# Altium PCB RadioPod_3.PcbDoc
Units mm, origin at the board's own origin, x right, y up, seen from the top; angles counter-clockwise.
Board outline 48.8 x 62.2 mm, 3 copper layers (Top Layer, GND, Bottom Layer), stack 0.488 mm thick; 70 components, 115 nets, 414 pads, 64 vias.
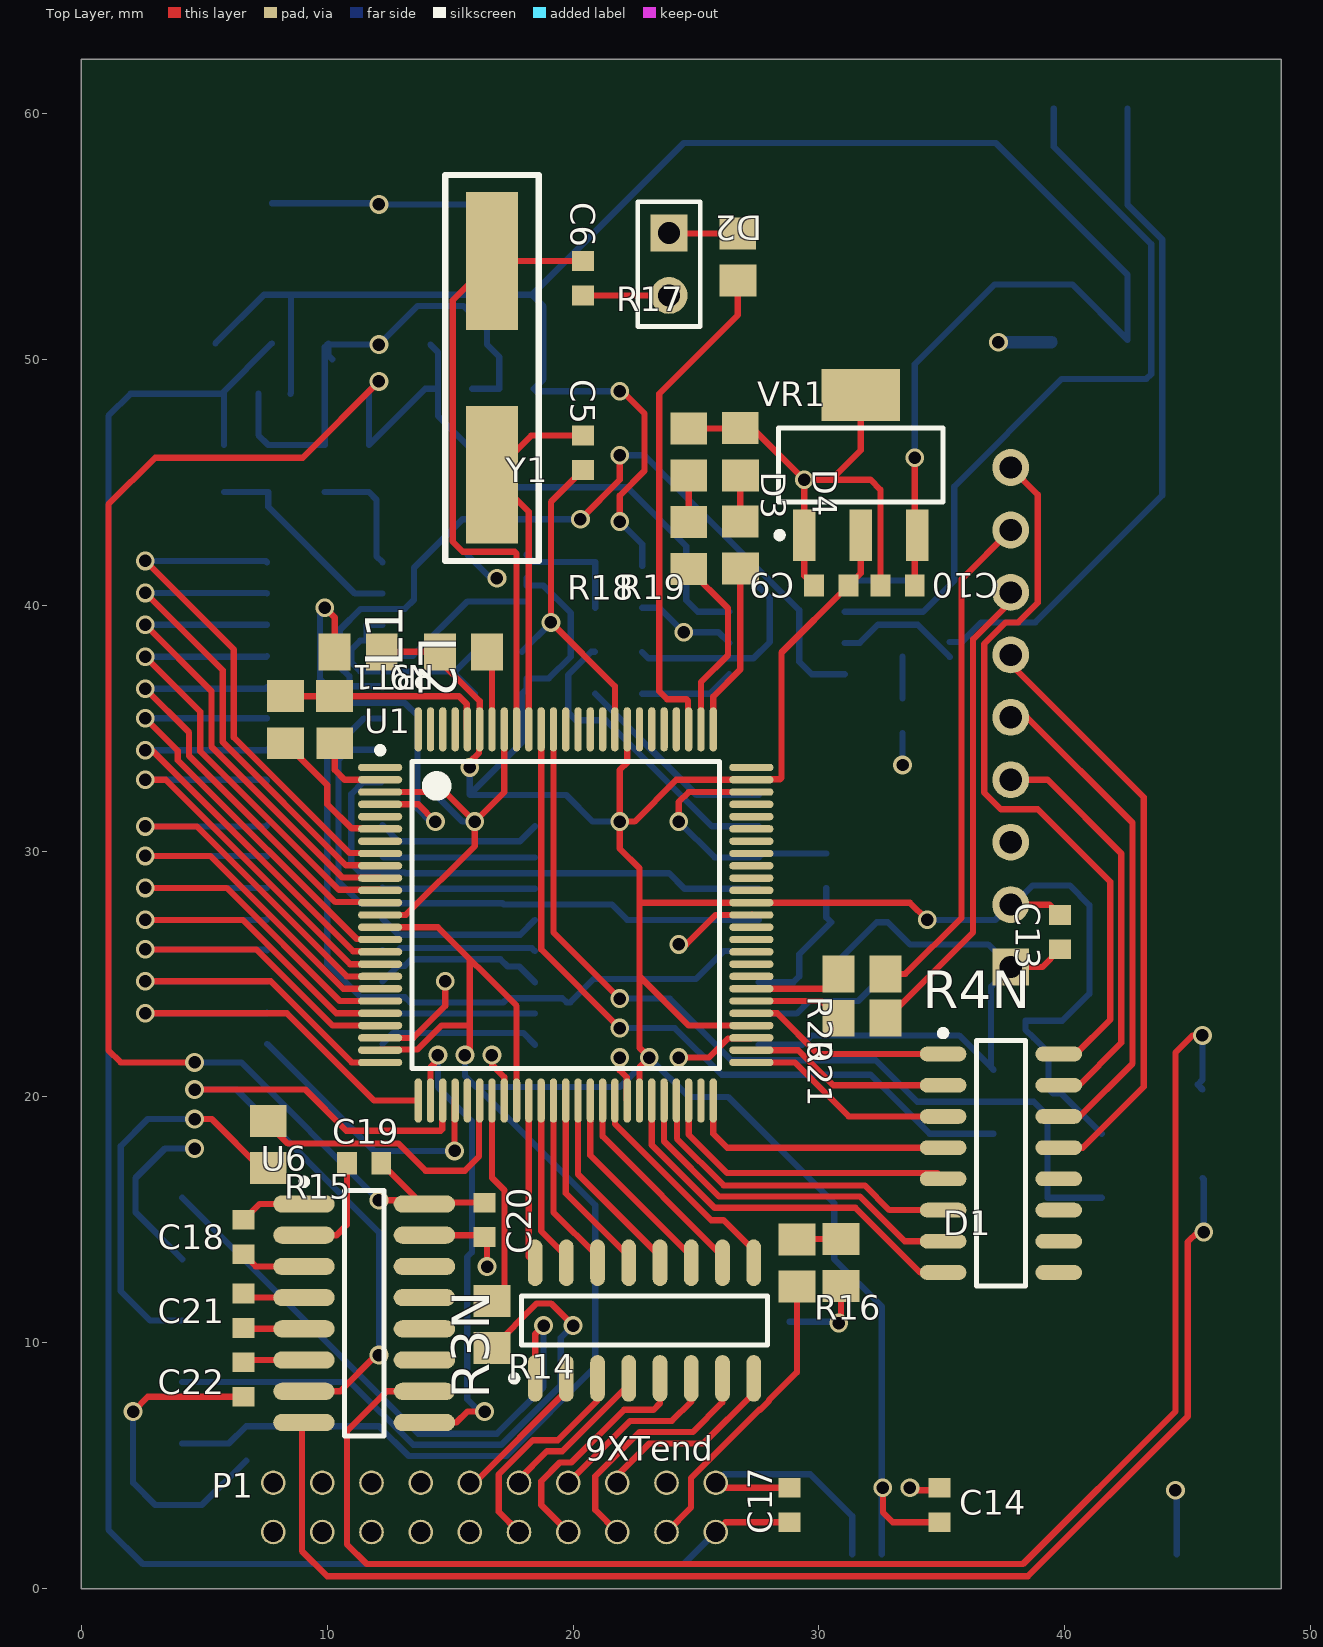
[diagram p0: Top Layer view]
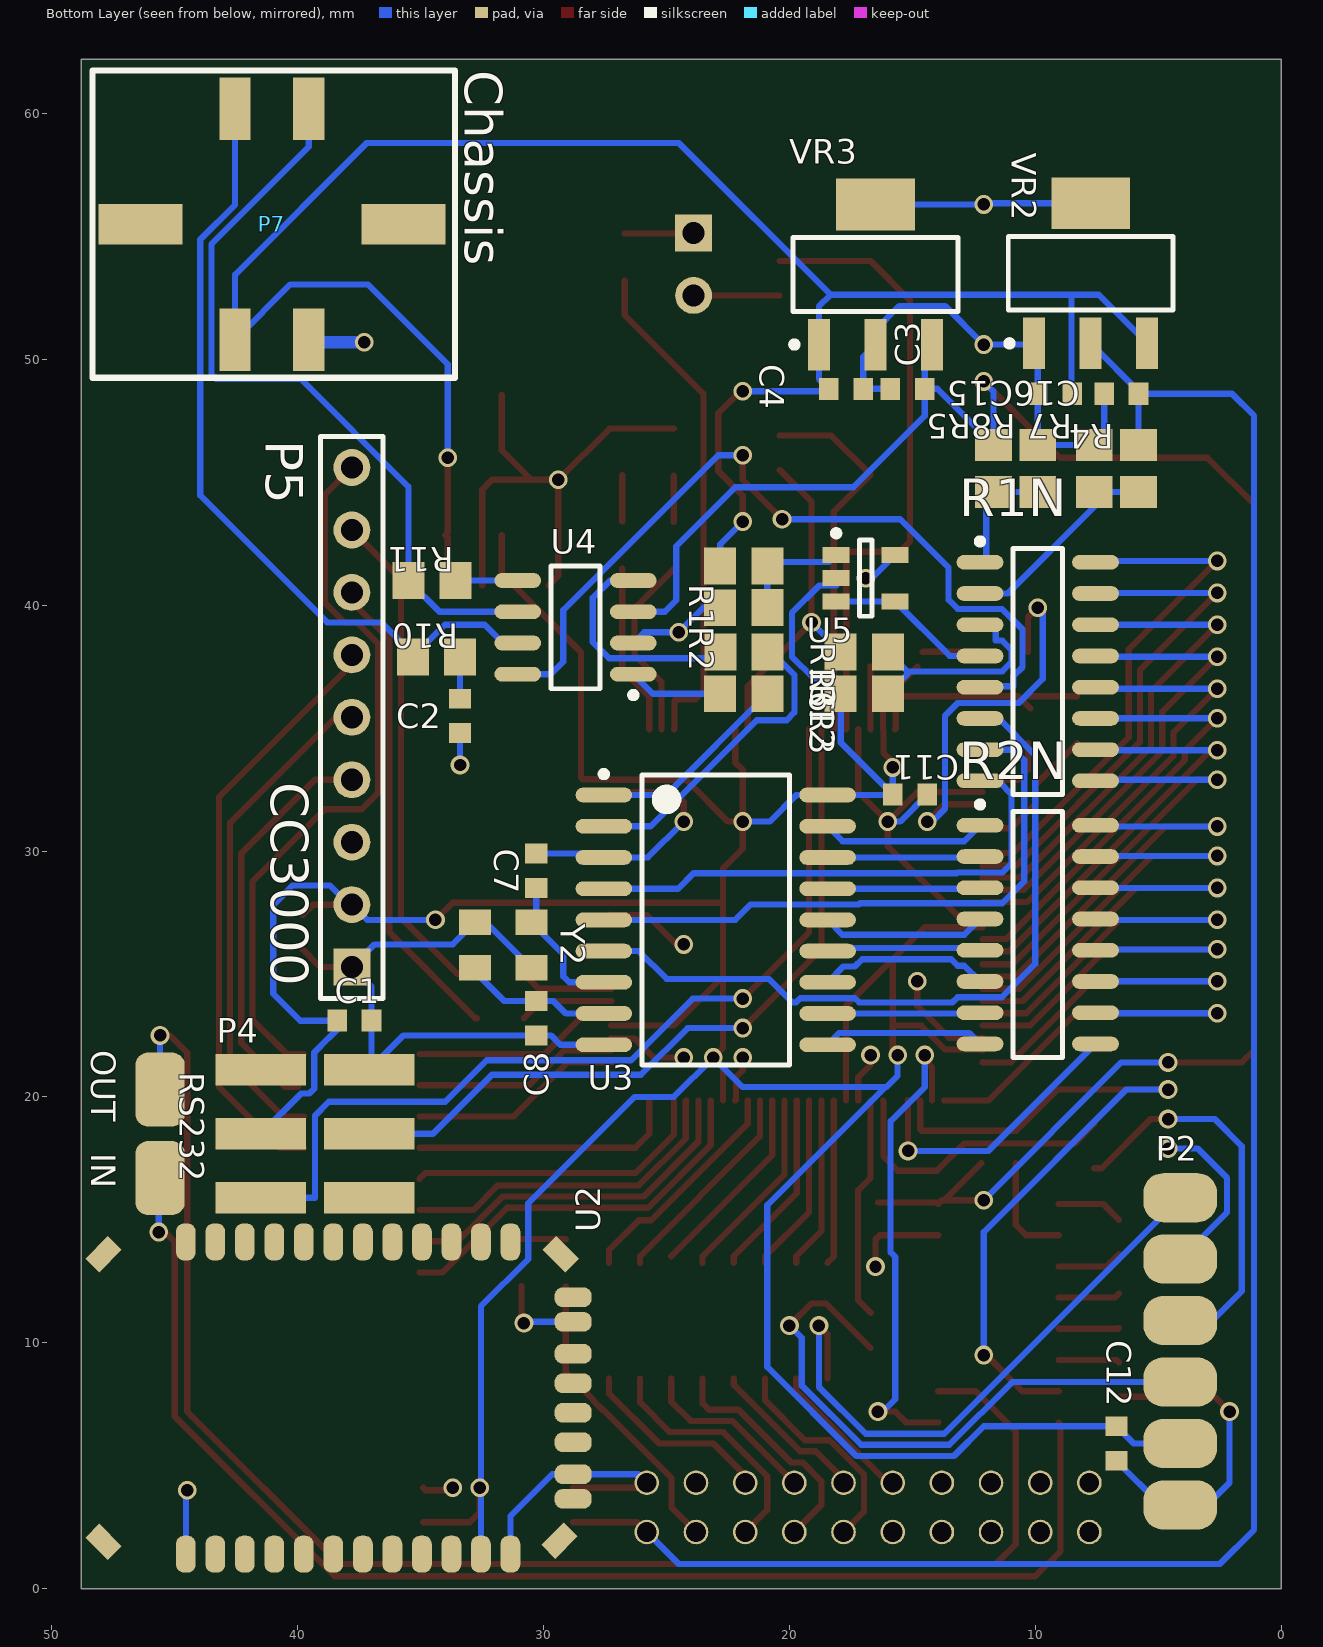
[diagram p1: Bottom Layer view, seen from below]
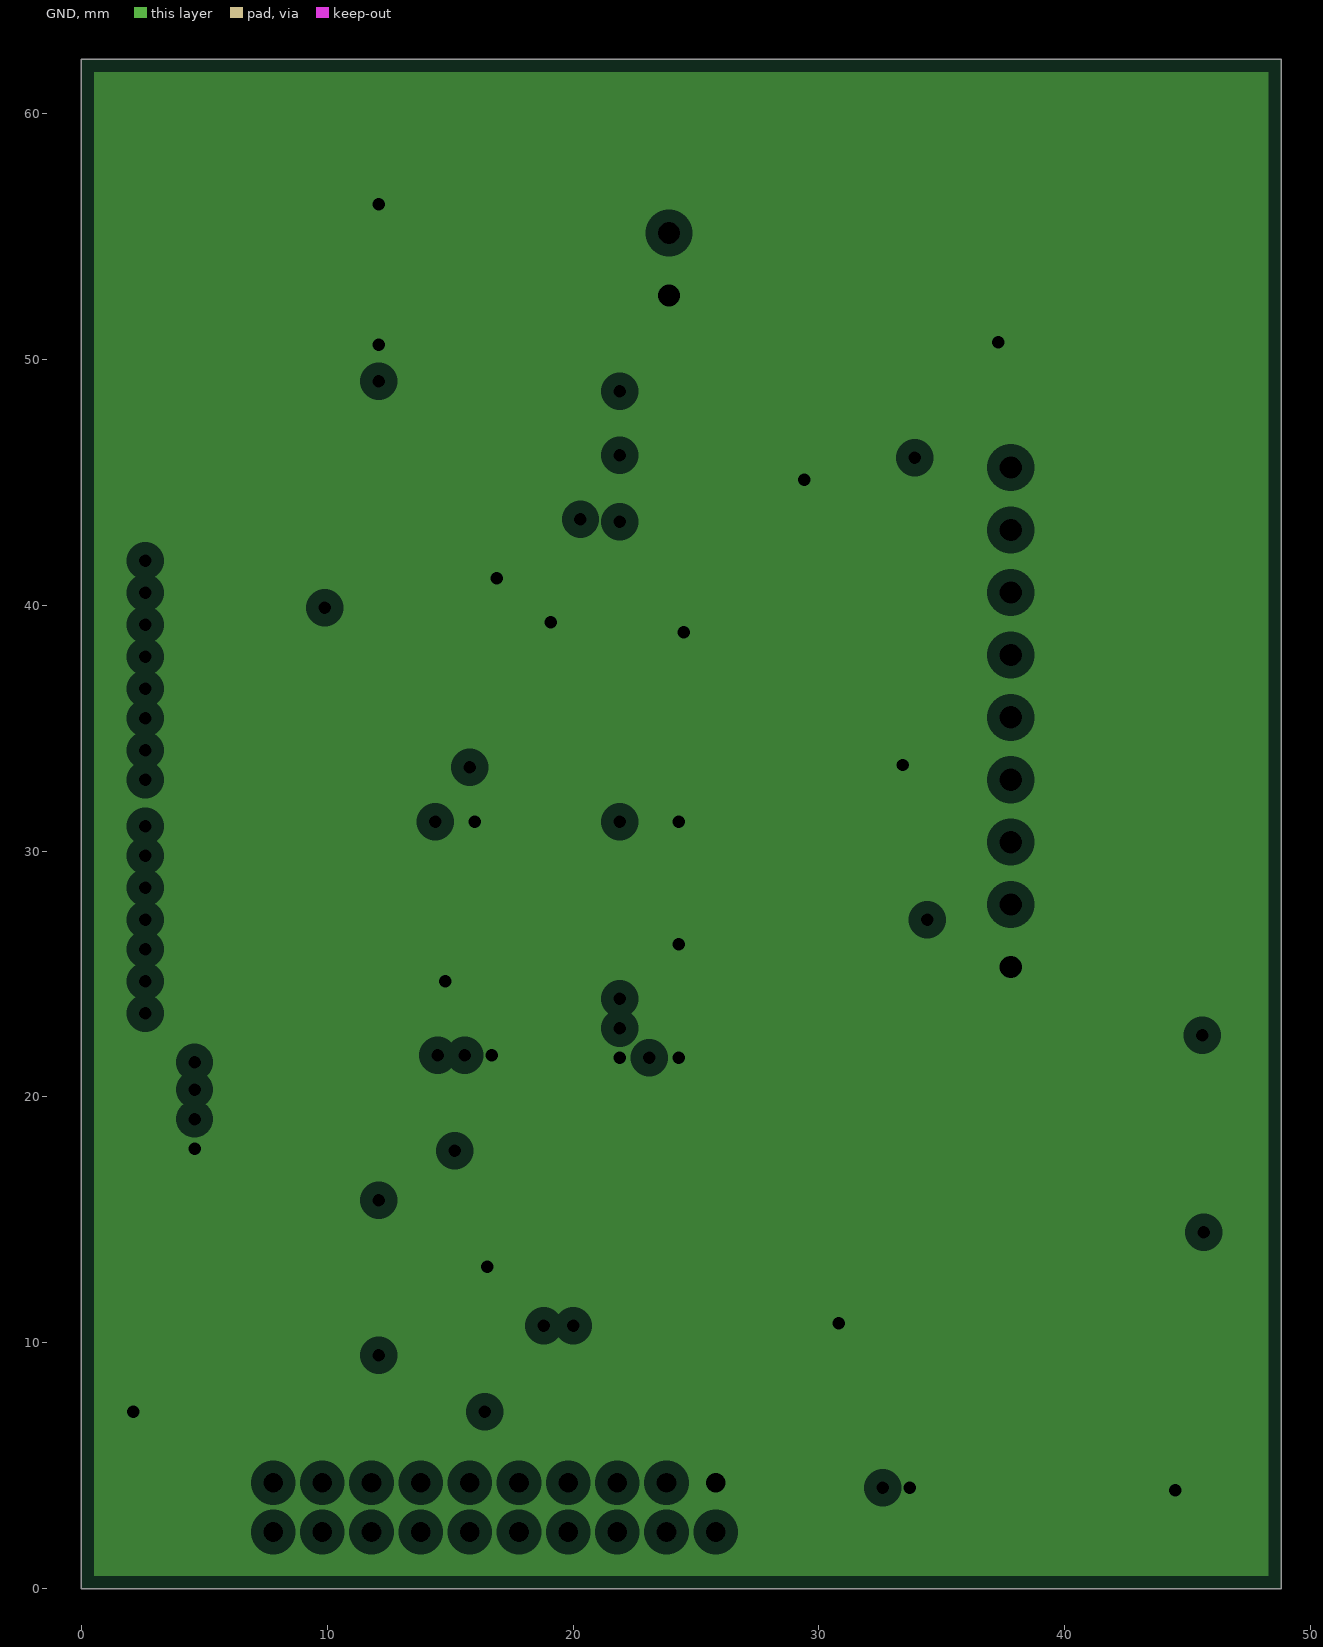
[diagram p2: GND, clearances drawn from the general rule]

## Layer stack, top to bottom
Top Solder: solder mask 0.0102, Solder Resist, Dk 3.5
Top Layer: signal copper 0.0356
Dielectric 1: core 0.254, FR-4, Dk 4.2
GND: plane copper 0.036, net GND
Dielectric 2: prepreg 0.127, Dk 4.2
Bottom Layer: signal copper 0.0356
Bottom Solder: solder mask 0.0102, Solder Resist, Dk 3.5

## Board outline
0,0 0,62.2 48.8,62.2 48.8,0

## Design rules (kind name [scope] priority, off if disabled: settings)
Clearance [All] p1: gap=0.2
PlaneClearance [All] p1: clearance=0.508
PlaneConnect [All] p1: planeconnectstyle=Relief reliefexpansion=0.508 reliefentries=4 reliefconductorwidth=0.254 reliefairgap=0.254
PolygonConnect [All] p1: connectstyle=Relief reliefconductorwidth=0.254 reliefentries=4 polygonreliefangle="90 Angle" airgapwidth=0.254
RoutingVias [All] p1: holewidth=0.711 width=1.27 viastyle="Through Hole" minholewidth=0.711 minwidth=1.27 maxholewidth=0.711 maxwidth=1.27
SolderMaskExpansion [All] p1: expansion=0.102
Width [All] p1: maxlimit=1 minlimit=0.1 preferedwidth=0.254
28 further rules are at their usual default settings.

## Classes and differential pairs
component class RadioPod_3: C1 C2 C3 C4 C5 C6 C7 C8 C9 C10 C11 C12 C13 C14 C15 C16 C17 C18 C19 C20 C21 C22 D1 D2 D3 D4 L1 L2 P1 P2 P4 P5 R1 R1N R2 R2N R3N R4N R9 R10 R11 RT1 U1 U2 U4 U5 U6 VR1 VR2 VR3 Y1 Y2

## Components (designator, comment, footprint, x,y, rotation, side; value= is the part's Value field where it differs from the comment)
C1 "Cap Semi" 1608[0603] 37.7,23.1 r0 bottom
C2 "Cap Semi" 1608[0603] 33.4,35.5 r90 bottom
C3 "Cap Semi" 1608[0603] 15.2,48.8 r0 bottom
C4 "Cap Semi" 1608[0603] 17.7,48.8 r180 bottom
C5 "Cap Semi" 1608[0603] 20.4,46.2 r270 top
C6 "Cap Semi" 1608[0603] 20.4,53.3 r270 top
C7 "Cap Semi" 1608[0603] 30.3,29.2 r90 bottom
C8 "Cap Semi" 1608[0603] 30.3,23.2 r270 bottom
C9 "Cap Semi" 1608[0603] 30.5,40.8 r180 top
C10 "Cap Semi" 1608[0603] 33.2,40.8 r180 top
C11 "Cap Semi" 1608[0603] 15.1,32.3 r180 bottom
C12 "Cap Semi" 1608[0603] 6.7,5.9 r270 bottom
C13 "Cap Semi" 1608[0603] 39.8,26.7 r270 top
C14 "Cap Semi" 1608[0603] 34.9,3.4 r90 top
C15 "Cap Semi" 1608[0603] 9.2,48.6 r180 bottom
C16 "Cap Semi" 1608[0603] 6.5,48.6 r180 bottom
C17 "Cap Semi" 1608[0603] 28.8,3.4 r270 top
C18 "Cap Semi" 1608[0603] 6.6,14.3 r90 top
C19 "Cap Semi" 1608[0603] 11.5,17.3 r0 top
C20 "Cap Semi" 1608[0603] 16.4,15 r90 top
C21 "Cap Semi" 1608[0603] 6.6,11.3 r90 top
C22 "Cap Semi" 1608[0603] 6.6,8.5 r90 top
D1 "LED2" 2012[0805]_LED 31.648,14.866 r180 top
D2 "AMBER" hdr1x2 23.9,55.14 r270 top
D3 "RED" 2012[0805]_LED 23.954,44.618 r0 top
D4 "YELLOW" 2012[0805]_LED 26.052,44.634 r0 top
L1 "Inductor" 2012[0805]_IND 17.15,37.35 r90 top
L2 "Inductor" 2012[0805]_IND 9.65,38.85 r270 top
P1 "9XTend" "9XTend Header" 7.3,4.8 r270 top
P2 "EM-506" EM_506 5.6,2.4 r180 bottom
P4 "ISP Header" "ISP HEADER" 39.3,18.5 r90 bottom
P5 "CC3000" HDR1X9 37.8,25.28 r90 bottom
P7 "9XTend Header" "Molex 4 Pin" 48.1,61.5 r270 bottom
R1 "Res3" 2012[0805]_RES 23.566,42.448 r270 bottom
R1N "4816P" SOIC16_L 9.9,37.3 r180 bottom
R2 "Res3" 2012[0805]_RES 23.566,40.748 r270 bottom
R2N "4816P" SOIC16_L 9.9,26.6 r180 bottom
R3 "Res3" 2012[0805]_RES 18.666,37.248 r270 bottom
R3N "4816P" SOIC16_L 22.9,10.9 r90 top
R4 "Res3" 2012[0805]_RES 4.952,47.266 r0 bottom
R4N "4816P" SOIC16_L 37.4,17.3 r0 top
R5 "Res3" 2012[0805]_RES 10.852,47.266 r0 bottom
R6 "Res3" 2012[0805]_RES 18.666,38.948 r270 bottom
R7 "Res3" 2012[0805]_RES 6.752,47.266 r0 bottom
R8 "Res3" 2012[0805]_RES 9.052,47.266 r0 bottom
R9 "Res3" 2012[0805]_RES 11.15,37.05 r180 top
R10 "Res3" 2012[0805]_RES 36.066,38.748 r270 bottom
R11 "Res3" 2012[0805]_RES 36.25,41.85 r270 bottom
R12 "Res3" 2012[0805]_RES 20.15,35.55 r90 bottom
R13 "Res3" 2012[0805]_RES 20.134,37.252 r90 bottom
R14 "Res3" 2012[0805]_RES 15.852,9.034 r0 top
R15 "Res3" 2012[0805]_RES 6.75,16.35 r0 top
R16 "Res3" 2012[0805]_RES 28.252,11.534 r0 top
R17 "Res3" 2012[0805]_RES 25.85,52.45 r0 top
R18 "Res3" 2012[0805]_RES 23.854,40.718 r0 top
R19 "Res3" 2012[0805]_RES 25.952,40.734 r0 top
R20 "Res3" 2012[0805]_RES 30.05,25.85 r270 top
R21 "Res3" 2012[0805]_RES 30.05,24.05 r270 top
RT1 "Res Thermal" 2012[0805]_RES 9.15,37.05 r180 top
U1 "ATxmega128A1-AU" 100A_N 19.7,27.4 r0 top
U2 "RN-41" RN41 28.55,1.15 r90 bottom
U3 "MCP2515-I/SO" SOIC-SO18_N 23,27.2 r180 bottom
U4 "TJA1040" SO8_L 28.7,39.1 r0 bottom
U5 "MCP6001UT" SOT-23-OT5_N 16.9,41.1 r180 bottom
U6 "MAX232D" D016_M 11.5,11.2 r0 top
VR1 "NCV1117ST33T3G" SOT223_L 31.7,45.7 r90 top
VR2 "NCV1117ST33T3G" SOT223_L 7.75,53.5 r90 bottom
VR3 "UA78M05IDCY" SOT223_L 16.5,53.45 r90 bottom
Y1 "16MHz" CRYSTAL 17.75,42.5 r90 top
Y2 "20MHz" MCP2515_XTAL 29.674,24.566 r90 bottom

## Footprints (in the part's own frame and the unit in brackets; to place one, negate y for a bottom-side part, rotate by r counter-clockwise, add the part's x,y. Pads: shape width x height; smd on the part's side, far side on the other; paste and mask are expansions set on the pad)
"9XTend Header" [mm]
  round 1 hole 0.8: P1(0.5,18.5) P2(2.5,18.5) P3(0.5,16.5) P4(2.5,16.5) P5(0.5,14.5) P6(2.5,14.5) P7(0.5,12.5) P8(2.5,12.5) P9(0.5,10.5) P10(2.5,10.5) P11(0.5,8.5) P12(2.5,8.5) P13(0.5,6.5) P14(2.5,6.5) P15(0.5,4.5) P16(2.5,4.5) P17(0.5,2.5) P18(2.5,2.5) P19(0.5,0.5) P20(2.5,0.5)
100A_N [mm] "Thin QFP, 100-Leads, Body 14x14mm, Pitch 0.5mm, IPC Medium Density"
  oval 1.8x0.3 smd: 1(-7.55,6) 2(-7.55,5.5) 3(-7.55,5) 4(-7.55,4.5) 5(-7.55,4) 6(-7.55,3.5) 7(-7.55,3) 8(-7.55,2.5) 9(-7.55,2) 10(-7.55,1.5) 11(-7.55,1) 12(-7.55,0.5) 13(-7.55,0) 14(-7.55,-0.5) 15(-7.55,-1) 16(-7.55,-1.5) 17(-7.55,-2) 18(-7.55,-2.5) 19(-7.55,-3) 20(-7.55,-3.5) 21(-7.55,-4) 22(-7.55,-4.5) 23(-7.55,-5) 24(-7.55,-5.5) 25(-7.55,-6) 51(7.55,-6) 52(7.55,-5.5) 53(7.55,-5) 54(7.55,-4.5) 55(7.55,-4) 56(7.55,-3.5) 57(7.55,-3) 58(7.55,-2.5) 59(7.55,-2) 60(7.55,-1.5) 61(7.55,-1) 62(7.55,-0.5) 63(7.55,0) 64(7.55,0.5) 65(7.55,1) 66(7.55,1.5) 67(7.55,2) 68(7.55,2.5) 69(7.55,3) 70(7.55,3.5) 71(7.55,4) 72(7.55,4.5) 73(7.55,5) 74(7.55,5.5) 75(7.55,6)
  oval 0.3x1.8 smd: 26(-6,-7.55) 27(-5.5,-7.55) 28(-5,-7.55) 29(-4.5,-7.55) 30(-4,-7.55) 31(-3.5,-7.55) 32(-3,-7.55) 33(-2.5,-7.55) 34(-2,-7.55) 35(-1.5,-7.55) 36(-1,-7.55) 37(-0.5,-7.55) 38(0,-7.55) 39(0.5,-7.55) 40(1,-7.55) 41(1.5,-7.55) 42(2,-7.55) 43(2.5,-7.55) 44(3,-7.55) 45(3.5,-7.55) 46(4,-7.55) 47(4.5,-7.55) 48(5,-7.55) 49(5.5,-7.55) 50(6,-7.55) 76(6,7.55) 77(5.5,7.55) 78(5,7.55) 79(4.5,7.55) 80(4,7.55) 81(3.5,7.55) 82(3,7.55) 83(2.5,7.55) 84(2,7.55) 85(1.5,7.55) 86(1,7.55) 87(0.5,7.55) 88(0,7.55) 89(-0.5,7.55) 90(-1,7.55) 91(-1.5,7.55) 92(-2,7.55) 93(-2.5,7.55) 94(-3,7.55) 95(-3.5,7.55) 96(-4,7.55) 97(-4.5,7.55) 98(-5,7.55) 99(-5.5,7.55) 100(-6,7.55)
  silkscreen extent -7.67,-6.25 6.25,6.82, body extent -7,-7 7,7, height 1.2
1608[0603] [mm] "Chip Capacitor, Body 1.6x0.8mm, IPC High Density"
  rect 0.8x0.9 smd: 1(-0.7,0) 2(0.7,0)
  body extent -0.87,-0.48 0.87,0.48, height 1.3
2012[0805]_IND [mm]
  rect 1.5x1.3 smd: 1(0.75,0.65) 2(0.748,2.566)
  body extent 0.1,0.2 1.4,3, height 1.5
2012[0805]_LED [mm]
  rect 1.5x1.3 smd: 1(0.75,0.65) 2(0.748,2.566)
  body extent 0.1,0.2 1.4,3, height 1
2012[0805]_RES [mm] "2012[0805] Resistor"
  rect 1.5x1.3 smd: 1(0.85,0.75) 2(0.848,2.666)
  body extent 0.2,0.3 1.5,3.1, height 0.5
CRYSTAL [mm]
  rect 5.6x2.1 smd: 1(2.8,1.05) 2(11.5,1.05)
  silkscreen extent -0.7,-0.85 15,2.95, body extent 1.28,-0.85 13.23,2.95, height 4
D016_M [mm] "SOIC, 16-Leads, Body 9.9x3.9mm, Pitch 1.27mm, IPC Low Density"
  oval 2.5x0.7 smd: 1(-2.45,4.445) 2(-2.45,3.175) 3(-2.45,1.905) 4(-2.45,0.635) 5(-2.45,-0.635) 6(-2.45,-1.905) 7(-2.45,-3.175) 8(-2.45,-4.445) 9(2.45,-4.445) 10(2.45,-3.175) 11(2.45,-1.905) 12(2.45,-0.635) 13(2.45,0.635) 14(2.45,1.905) 15(2.45,3.175) 16(2.45,4.445)
  silkscreen extent -2.57,-5 0.8,5.47, body extent -2,-5 2,5, height 1.75
EM_506 [mm]
  rrect80% 3x2 smd: A1(1.5,1) A2(1.5,3.5) A3(1.5,6) A4(1.5,8.5) A5(1.5,11) A6(1.5,13.5)
hdr1x2 [mm] "Connector; Header; 2 Position"
  rect 1.5x1.5 hole 0.9: 1(0,0)
  round 1.5 hole 0.9: 2(2.54,0)
  silkscreen extent -1.27,-1.27 3.81,1.27
HDR1X9 [mm] "Connector; Header; 9 Position"
  rect 1.5x1.5 hole 0.9: 1(0,0)
  round 1.5 hole 0.9: 2(2.54,0) 3(5.08,0) 4(7.62,0) 5(10.16,0) 6(12.7,0) 7(15.24,0) 8(17.78,0) 9(20.32,0)
  silkscreen extent -1.27,-1.27 21.59,1.27
"ISP HEADER" [mm]
  rect 1.27x3.68 smd: 1(-2.6,2.2) 2(0,2.2) 3(2.6,2.2) 4(-2.6,-2.2) 5(0,-2.2) 6(2.6,-2.2)
  body extent -3.75,-2.5 3.75,2.5, height 10
MCP2515_XTAL [mm]
  rect 1.05x1.3 smd: 1(0.684,3.126) 2(2.534,0.826) 3(0.684,0.826) 4(2.534,3.126)
"Molex 4 Pin" [mm]
  rect 2.54x1.27 smd: 1(1.3,8.55) 2(1.3,5.55) 3(10.7,5.55) 4(10.7,8.55)
  rect 1.65x3.43 smd: 5(6,12.4) 6(6,1.7)
  silkscreen extent -0.25,-0.25 12.25,14.5, body extent 1.5,2.23 10.5,11.88, height 13
RN41 [mm]
  rrect80% 1.5x0.8 smd: A1(0.25,16) A2(0.25,14.8) A3(0.25,13.6) A4(0.25,12.4) A5(0.25,11.2) A6(0.25,10) A7(0.25,8.8) A8(0.25,7.6) A9(0.25,6.4) A10(0.25,5.2) A11(0.25,4) A12(0.25,2.8) A21(12.95,2.8) A22(12.95,4) A23(12.95,5.2) A24(12.95,6.4) A25(12.95,7.6) A26(12.95,8.8) A27(12.95,10) A28(12.95,11.2) A29(12.95,12.4) A30(12.95,13.6) A31(12.95,14.8) A32(12.95,16)
  rrect80% 0.8x1.5 smd: A13(2.5,0.25) A14(3.5,0.25) A15(4.8,0.25) A16(6,0.25) A17(7.2,0.25) A18(8.4,0.25) A19(9.7,0.25) A20(10.7,0.25)
  rect 0.8x1.3 smd rot 135: SH1(0.75,19.35) SH3(12.45,0.75)
  rect 0.8x1.3 smd rot 45: SH2(0.8,0.8) SH4(12.45,19.35)
  body extent 1,1 12.2,25.8, height 1
SO8_L [mm] "SOIC, 8-Leads, Body 4.9x3.9mm, Pitch 1.27mm, IPC High Density"
  oval 1.9x0.6 smd: 1(-2.35,1.905) 2(-2.35,0.635) 3(-2.35,-0.635) 4(-2.35,-1.905) 5(2.35,-1.905) 6(2.35,-0.635) 7(2.35,0.635) 8(2.35,1.905)
  silkscreen extent -2.47,-2.5 1,2.88, body extent -2,-2.5 2,2.5, height 1.75
SOIC16_L [mm] "SOIC, 16-Leads, Body 9.9x3.9mm, Pitch 1.27mm, IPC High Density"
  oval 1.9x0.6 smd: 1(-2.35,4.445) 2(-2.35,3.175) 3(-2.35,1.905) 4(-2.35,0.635) 5(-2.35,-0.635) 6(-2.35,-1.905) 7(-2.35,-3.175) 8(-2.35,-4.445) 9(2.35,-4.445) 10(2.35,-3.175) 11(2.35,-1.905) 12(2.35,-0.635) 13(2.35,0.635) 14(2.35,1.905) 15(2.35,3.175) 16(2.35,4.445)
  silkscreen extent -2.48,-5 1,5.42, body extent -2,-5 2,5, height 1.91
SOIC-SO18_N [mm] "SOIC, 18-Leads, Body 11.5x7.5mm, Pitch 1.27mm, IPC Medium Density"
  oval 2.3x0.6 smd: 1(-4.55,5.08) 2(-4.55,3.81) 3(-4.55,2.54) 4(-4.55,1.27) 5(-4.55,0) 6(-4.55,-1.27) 7(-4.55,-2.54) 8(-4.55,-3.81) 9(-4.55,-5.08) 10(4.55,-5.08) 11(4.55,-3.81) 12(4.55,-2.54) 13(4.55,-1.27) 14(4.55,0) 15(4.55,1.27) 16(4.55,2.54) 17(4.55,3.81) 18(4.55,5.08)
  silkscreen extent -4.67,-5.9 3,6.05, body extent -3.8,-5.95 3.8,5.95, height 2.65
SOT223_L [mm] "SOT223, 4-Leads, Body 6.5x3.5mm, Pitch 2.3mm, Lead Span 7mm, IPC High Density"
  rect 2.1x0.9 smd: 1(-2.85,2.3) 2(-2.85,0) 3(-2.85,-2.3)
  rect 2.1x3.2 smd: 4(2.85,0)
  silkscreen extent -2.97,-3.35 1.5,3.42, body extent -1.85,-3.35 1.85,3.35, height 1.7
SOT-23-OT5_N [mm] "SOT23, 5-Leads, Body 2.9x1.6mm, Pitch 0.95mm, Lead Span 2.7mm, IPC Medium Density"
  rect 1.1x0.65 smd: 1(-1.2,0.95) 2(-1.2,0) 3(-1.2,-0.95) 4(1.2,-0.95) 5(1.2,0.95)
  silkscreen extent -1.33,-1.55 0.25,1.95, body extent -0.9,-1.55 0.9,1.55, height 1.45

## Part data
C1 C2 C3 C4 C5 C6 C7 C8 C9 C10 C11 C12 C13 C14 C15 C16 C17 C18 C19 C20 C21 C22: "Capacitor (Semiconductor SIM Model)"
D1: "Typical RED, GREEN, YELLOW, AMBER GaAs LED"
D2: library part LED0, "Typical INFRARED GaAs LED"
D3 D4: library part LED2, "Typical RED, GREEN, YELLOW, AMBER GaAs LED"
P1: "9XTend Header Pins"
P2: "EM-506 GPS Module Pads"
P4: library part "Header 3X2", "Header, 3-Pin, Dual row"
P5: "CC3000 Wifi Module"
R1 R2 R3 R4 R5 R6 R7 R8 R9 R10 R11 R12 R13 R14 R15 R16 R17 R18 R19 R20 R21: "Resistor"
R1N R2N R3N R4N: "Resistor Network SOIC-16 package"
RT1: "Thermistor"
U1: "8/16-bit AVR XMEGA A1 Microcontroller, 1.6-3.6V, 128KB + 8KB Flash, 2KB EEPROM, 8KB SRAM, 100-pin TQFP, Industrial Grade (-40°C to 85°C), Pb-Free"
U2: library part RN41, "RN-41 Bluetooth Module"
U3: "Stand-Alone CAN Controller With SPI Interface, 18-Pin SOIC, Industrial Temperature"
U5: library part MCP6001UT-I/OT, "1 MHz, Low-Power Operational Amplifier, 5-Pin SOT-23, Industrial Temperature, Tape and Reel"
U6: "Dual EIA-232 Driver/Receiver"
Y1 Y2: library part XTAL, "Crystal Oscillator"

## Free pads (board coordinates)
  rrect50% 2x3 smd far side: 1(45.6,20.3) 2(45.6,16.7)

## Via types
v1: diameter 0.762, hole 0.508, Top Layer to Bottom Layer, 64 vias

## Nets (pads, with @x,y where several pads share a name; then routed paths per layer and width w, separated by ;. In a path a pad name is that pad's centre, name@x,y a point inside that pad or via, vN(x,y) a via of type N, cw(c..) or ccw(c..) an arc to the next point about the centre after c; other vN are vias at no path point)
CANH: P7.2 R10.1 U4.7 | length 32.6
  Bottom Layer w0.254: U4.7 31.665,38.465 32.4,39.2 34.014,39.2 R10.1 ; R10.1@35.316,38.498 35.798,38.498 36.6,39.3 38.8,39.3 43.966,44.466 43.966,54.876 42.55,56.292 P7.2
CANL: P7.1 R11.1 U4.6 | length 31.1
  Bottom Layer w0.254: U4.6 34.235,39.735 R11.1 35.5,44.823 39.88,49.203 43.32,49.203 43.512,49.395 43.512,54.688 39.55,58.65 P7.1
GLV: C4.1 C10.1 C15.2 P7.3 R1.1 VR1.3 VR2.3 VR3.1 | length 85.6
  Top Layer w0.254: v1(21.9,43.4) 21.9,44.458 22.9,45.458 22.9,47.8 v1@21.95,48.75 ; C10.1 33.9,42.75 VR1.3 33.9,42.95 v1(33.9,46)
  Bottom Layer w0.254: VR2.3 7.427,52.627 8.527,52.627 ; C15.2 8.527,48.627 8.527,52.627 ; v1(21.9,43.4) 22.816,42.484 R1.1 ; v1@22,48.7 18.5,48.7 C4.1 18.8,49.2 VR3.1 18.8,52.154 18.327,52.627 ; v1(33.9,46) 33.9,49.8 37.15,53.05 40.3,53.05 P7.3 42.55,53.45 37.2,58.8 24.5,58.8 18.327,52.627 ; 8.527,52.627 18.327,52.627
  other v1: 21.9,48.7
GND: C1.1 C2.1 C3.2 C4.2 C5.2 C6.2 C7.2 C8.2 C9.2 C10.2 C11.2 C12.2 C13.2 C14.2 C15.1 C16.1 C17.1 C20.1 C22.1 D1.2 D2.2 D3.2 D4.2 P1.P1 P2.A1 P2.A5 P4.6 P5.1 P7.4 R2.1 R6.1 R7.1 R8.1 U1.3 U1.13 U1.23 U1.33 U1.43 U1.53 U1.63 U1.73 U1.84 U1.93 U2.A1 U2.A12 U2.A14 U2.A19 U3.3 U3.9 U4.2 U5.5 U6.15 VR1.1 VR1.4 VR2.1 VR2.4 VR3.2 VR3.4 Y2.3 Y2.4 | length 187.8
  Top Layer w0.254: v1(2.1,7.2) 2.7,7.8 C22.1 ; U1.23 13.5,22.4 14.8,23.7 v1(14.8,24.7) ; U1.13 13.2,27.4 16,30.2 v1(16,31.2) ; U1.3 14.8,32.4 v1(16,31.2) ; U6.15 16.325,14.375 16.5,14.2 v1(16.5,13.1) ; v1(16.7,21.7) 16.7,21.306 17.2,20.806 U1.33 ; U1.93 17.2,32.4 v1(16,31.2) ; C5.2 19.1,44.2 v1(19.1,39.3) 21.7,36.7 U1.84 ; C6.2 D2.2 ; v1(21.9,21.6) 21.9,21.075 22.177,20.798 22.177,19.873 U1.43 ; v1@24.2,21.6 25.525,21.6 26.302,22.377 27.227,22.377 U1.53 ; v1(24.3,26.2) 24.6,26.2 25.8,27.4 U1.63 U1.63@27.273,27.423 ; v1(24.3,31.2) 24.3,32 24.7,32.4 U1.73 U1.73@27.273,32.377 ; D3.2 27.316,47.184 v1(29.4,45.1) ; P1.P1 26,4.1 C17.1 ; C9.2 29.4,41.2 VR1.1 v1(29.4,45.1) ; v1(30.8,10.8) 30.9,10.9 D1.2 ; VR1.4 31.7,46.3 30.5,45.1 ; C10.2 32.5,44.7 32.1,45.1 30.5,45.1 ; v1@33.7,4 34.8,4 C14.2 ; P5.1 39.08,25.28 C13.2 ; v1(29.4,45.1) 30.5,45.1
  Bottom Layer w0.254: v1(2.1,7.2) 2.1,4.3 3,3.4 P2.A1 4.9,3.4 C12.2 ; P2.A5 2.2,15.3 2.2,16.7 3.4,17.9 v1(4.6,17.9) ; C16.1 7.2,46.918 R7.1 R8.1 9.9,46.518 C15.1 9.9,50.5 10,50.6 v1(12.1,50.6) 13.673,52.173 15.527,52.173 16.5,51.2 VR3.2 17,50.1 C4.2 C3.2 ; VR2.4 12.05,56.35 v1(12.1,56.3) VR3.4 ; VR2.1 10.05,50.15 VR2.1@10.2,50 ; C11.2 15.5,31.2 v1(16,31.2) ; U5.5 16.65,41.1 v1(16.9,41.1) ; R6.1 19.1,39.282 v1(19.1,39.3) ; R2.1 23.502,39.898 v1(24.5,38.9) 25.915,38.9 U4.2 ; v1(24.3,31.2) 25.76,29.74 U3.3 27.71,29.9 C7.2 ; P1.P1 26.15,4.65 U2.A14 29.65,4.65 31.35,2.95 U2.A12 ; U3.9 29.32,22.12 29.7,22.5 C8.2 35.7,22.5 P4.6@37,21.2 ; U2.A19 30.75,10.85 v1(30.8,10.8) ; Y2.3 32.35,27.1 Y2.4 33.7,26.2 36.88,26.2 P5.1 37,24.48 C1.1 P4.6@37,21.2 ; v1(33.4,33.5) C2.1 ; P4.6 P4.6@37,21.2 ; P7.4@39.45,50.7 P7.4 ; U2.A1 v1@44.55,4
  Bottom Layer w0.5: v1(37.3,50.7) P7.4@39.45,50.7
  other v1: 44.5,4 33.7,4.1 24.3,21.6
NetC2_2: C2.2 R10.2 | length 1.7
  Bottom Layer w0.254: C2.2 R10.2
NetC5_1: C5.1 U1.91 Y1.1 | length 15.3
  Top Layer w0.254: U1.91 18.2,43.8 Y1.1 18.3,46.9 C5.1
NetC6_1: C6.1 U1.92 Y1.2 | length 25.7
  Top Layer w0.254: U1.92 17.693,34.957 17.693,42.107 17.627,42.173 15.515,42.173 15.1,42.588 15.1,52.4 Y1.2 C6.1
NetC7_1: C7.1 U3.7 Y2.2 | length 6
  Bottom Layer w0.254: U3.7 28.96,24.66 29.2,24.9 29.2,25.8 Y2.2 30.3,27.3 C7.1
NetC8_1: C8.1 U3.8 Y2.1 | length 6.1
  Bottom Layer w0.254: U3.8 29.09,23.39 29.6,23.9 C8.1 31.6,23.9 32.8,25.1 Y2.1
NetC18_1: C18.1 U6.3 | length 2.7
  Top Layer w0.254: C18.1 7.095,13.105 U6.3
NetC18_2: C18.2 U6.1 | length 2.7
  Top Layer w0.254: C18.2 7.245,15.645 U6.1
NetC19_1: C19.1 U6.2 | length 4.4
  Top Layer w0.254: U6.2 10.375,14.375 10.8,14.8 C19.1
NetC21_1: C21.1 U6.5 | length 2.5
  Top Layer w0.254: C21.1 6.635,10.565 U6.5
NetC21_2: C21.2 U6.4 | length 2.5
  Top Layer w0.254: C21.2 6.765,11.835 U6.4
NetC22_2: C22.2 U6.6 | length 2.5
  Top Layer w0.254: C22.2 6.695,9.295 U6.6
NetD1_1: D1.1 R16.2 | length 1.8
  Top Layer w0.254: R16.2 29.116,14.216 D1.1
NetD2_1: D2.1 R17.2 | length 2.8
  Top Layer w0.254: D2.1 23.924,55.116 R17.2
NetD3_1: D3.1 R18.2 | length 1.9
  Top Layer w0.254: R18.2 24.702,45.266 D3.1
NetD4_1: D4.1 R19.2 | length 1.9
  Top Layer w0.254: R19.2 26.8,45.282 D4.1
NetL1_1: L1.1 U1.94 | length 2.6
  Top Layer w0.254: U1.94 16.7,37.486 L1.1@16.716,37.502
NetL2_1: L2.1 U1.4 | length 16.8
  Top Layer w0.254: v1(9.9,39.9) 10.3,39.5 L2.1 ; U1.4 13.7,31.9 v1(14.4,31.2)
  Bottom Layer w0.254: v1(9.9,39.9) 9.7,39.7 9.7,37 10.678,36.022 13.16,36.022 13.673,35.509 13.673,31.715 14.188,31.2 v1(14.4,31.2)
NetP1_4: P1.P4 R16.1 | length 12.2
  Top Layer w0.254: P1.P4 24.8,3.3 24.8,4.5 27.573,7.273 27.605,7.273 27.972,7.64 27.972,7.672 29.102,8.802 R16.1
NetP1_5: P1.P5 R3N.8 | length 7.8
  Top Layer w0.254: P1.P5 21.8,4.6 23.1,5.9 25.3,5.9 27.345,7.945 R3N.8
NetP1_6: P1.P6 R3N.7 | length 10
  Top Layer w0.254: P1.P6 20.9,3.2 20.9,4.57 22.695,6.365 24.865,6.365 26.075,7.575 R3N.7
NetP1_7: P1.P7 R3N.6 | length 7.3
  Top Layer w0.254: P1.P7 22.319,6.819 24.019,6.819 24.805,7.605 R3N.6
NetP1_8: P1.P8 R3N.5 | length 9.7
  Top Layer w0.254: P1.P8 18.7,3.4 18.7,4.37 19.457,5.127 19.927,5.127 22.073,7.273 23.273,7.273 23.535,7.535 R3N.5
NetP1_9: P1.P9 R3N.4 | length 6.5
  Top Layer w0.254: P1.P9 17.8,4.446 18.935,5.581 19.563,5.581 22.265,8.283 R3N.4
NetP1_10: P1.P10 R3N.3 | length 8.8
  Top Layer w0.254: P1.P10 16.973,3.127 16.973,4.643 18.365,6.035 19.375,6.035 20.995,7.655 R3N.3
NetP1_11: P1.P11 R3N.2 | length 5.9
  Top Layer w0.254: P1.P11@15.894,4.206 19.725,8.037 R3N.2
NetP2_3: P2.A3 R14.1 | length 24.5
  Top Layer w0.254: R14.1 18.518,11.6 19.1,11.6 v1(20,10.7)
  Bottom Layer w0.254: P2.A3 10.942,8.4 13.496,5.846 17.088,5.846 19.502,8.26 19.502,10.202 v1(20,10.7)
NetP2_4: P2.A4 R15.1 | length 16.2
  Top Layer w0.254: v1(4.6,19.1) 5.3,19.1 7.3,17.1 R15.1
  Bottom Layer w0.254: P2.A4 2.8,10.9 1.6,12.1 1.6,18 2.7,19.1 v1(4.6,19.1)
NetP2_6: P2.A6 R3N.1 | length 24.3
  Top Layer w0.254: R3N.1 18.455,10.355 v1(18.8,10.7)
  Bottom Layer w0.254: P2.A6 13.7,6.3 16.9,6.3 18.8,8.2 v1(18.8,10.7)
NetP4_1: P4.1 U1.89 | length 37
  Top Layer w0.254: U1.89 19.2,26.7 v1(21.9,24)
  Bottom Layer w0.254: v1(21.9,24) 23.933,24 26.44,21.493 32.307,21.493 34,19.8 38.737,19.8 39.3,19.237 39.3,15.9 P4.1
NetP4_5: P4.5 U1.90 | length 30.5
  Top Layer w0.254: U1.90 18.7,26 v1(21.9,22.8)
  Bottom Layer w0.254: v1(21.9,22.8) 24.142,22.8 26.042,20.9 32.1,20.9 34.5,18.5 P4.5
NetP5_4: P5.4 R4N.15 | length 16.5
  Top Layer w0.254: P5.4 39.3,32.9 42.3,29.9 42.3,22.2 40.5,20.4 R4N.15@40,20.4
NetP5_5: P5.5 R4N.14 | length 20.4
  Top Layer w0.254: P5.5 38.46,35.44 42.754,31.146 42.754,21.354 40.605,19.205 R4N.14
NetP5_6: P5.6 R4N.13 | length 24.3
  Top Layer w0.254: P5.6 37.8,37.6 43.208,32.192 43.208,20.408 40.735,17.935 R4N.13
NetP5_7: P5.7 R21.2 | length 19.5
  Top Layer w0.254: R21.2 32.778,23.202 36.269,26.693 36.269,38.614 37.8,40.145 P5.7
NetP5_8: P5.8 R20.2 | length 20.6
  Top Layer w0.254: R20.2 33.514,25.002 35.8,27.288 35.8,41.06 P5.8
NetP5_9: P5.9 R4N.16 | length 29.8
  Top Layer w0.254: P5.9 38.9,44.5 38.9,40.097 38.103,39.3 37.597,39.3 36.723,38.426 36.723,32.377 37.4,31.7 38.9,31.7 41.846,28.754 41.846,23.146 40.445,21.745 R4N.16
NetR1_2: R1.2 R2.2 U5.1 | length 4.8
  Bottom Layer w0.254: U5.1 18.398,41.752 20.9,41.752 R1.2 R2.2
NetR1N_1: R1N.1 R5.2 R8.2 | length 4.9
  Bottom Layer w0.254: R8.2 R5.2 12,44.3 12,41.995 R1N.1
NetR1N_2: R1N.2 R4.2 R7.2 | length 8.5
  Bottom Layer w0.254: R4.2 R7.2 7.6,44 11.125,40.475 R1N.2
NetR1N_3: R1N.3 R3.2 R6.2 | length 9.3
  Bottom Layer w0.254: R1N.3 11.605,39.205 11.605,38.562 11.34,38.562 10.973,38.195 10.973,37.675 11.34,37.308 15.208,37.308 ; R3.2 15.208,37.192 15.208,37.308 ; R6.2 15.208,37.308
NetR1N_4: R1N.4 U5.3 U5.4 | length 6.8
  Bottom Layer w0.254: R1N.4 13.485,37.935 U5.4 U5.3
NetR1N_5: R1N.5 U4.8 | length 33.6
  Top Layer w0.254: v1(20.3,43.5) 21.9,45.1 v1(21.9,46.1)
  Bottom Layer w0.254: R1N.5 12.215,36.7 10.9,36.7 10.9,37.106 10.519,37.487 10.519,39.011 11.356,39.848 13.16,39.848 13.527,40.215 13.527,41.527 15.5,43.5 v1(20.3,43.5) ; v1(21.9,46.1) 22.9,46.1 29.2,39.8 29.2,37.7 29.705,37.195 U4.8
NetR1N_6: R1N.6 U3.6 | length 30.6
  Bottom Layer w0.254: R1N.6 11.495,35.395 10,33.9 10,25.408 11.356,24.052 13.16,24.052 13.368,23.844 17.167,23.844 17.34,24.017 19.56,24.017 19.733,23.844 19.884,23.844 20.84,24.8 25,24.8 26.13,25.93 U3.6
NetR1N_7: R1N.7 U3.5 | length 24.7
  Bottom Layer w0.254: R1N.7 10.879,34.125 10.454,33.7 10.454,28.764 11.34,27.878 17.126,27.878 17.177,27.827 21.573,27.827 22.2,27.2 U3.5
NetR1N_8: R1N.8 U3.4 | length 21.3
  Bottom Layer w0.254: R1N.8 12.195,32.8 11.454,32.8 10.973,32.319 10.973,29.488 11.329,29.132 13.16,29.132 13.195,29.097 23.903,29.097 24.53,28.47 U3.4
NetR1N_9: R1N.9 U1.17 | length 17.6
  Top Layer w0.254: v1(2.6,32.9) 3.429,32.9 10.929,25.4 U1.17
  Bottom Layer w0.254: v1(2.6,32.9) 7.505,32.9 R1N.9
NetR1N_10: R1N.10 U1.16 | length 17.9
  Top Layer w0.254: v1(2.6,34.1) 2.871,34.1 11.048,25.923 12.127,25.923 U1.16
  Bottom Layer w0.254: v1(2.6,34.1) 7.525,34.1 R1N.10
NetR1N_11: R1N.11 U1.15 | length 18.5
  Top Layer w0.254: v1(2.6,35.4) 3.921,34.079 3.921,33.693 11.19,26.423 12.127,26.423 U1.15
  Bottom Layer w0.254: v1(2.6,35.4) 7.545,35.4 R1N.11
NetR1N_12: R1N.12 U1.12 | length 18.7
  Top Layer w0.254: v1(2.6,36.6) 4.375,34.825 4.375,33.881 10.332,27.923 12.127,27.923 U1.12
  Bottom Layer w0.254: v1(2.6,36.6) 7.485,36.6 R1N.12
NetR1N_13: R1N.13 U1.11 | length 19.4
  Top Layer w0.254: v1(2.6,37.9) 4.838,35.662 4.838,34.059 10.474,28.423 12.127,28.423 U1.11
  Bottom Layer w0.254: v1(2.6,37.9) 7.515,37.9 R1N.13
NetR1N_14: R1N.14 U1.10 | length 20.1
  Top Layer w0.254: v1(2.6,39.2) 5.292,36.508 5.292,34.247 10.616,28.923 12.127,28.923 U1.10
  Bottom Layer w0.254: v1(2.6,39.2) 7.545,39.2 R1N.14
NetR1N_15: R1N.15 U1.9 | length 20.8
  Top Layer w0.254: v1(2.6,40.5) 5.746,37.354 5.746,34.436 10.759,29.423 12.127,29.423 U1.9
  Bottom Layer w0.254: v1(2.6,40.5) 7.525,40.5 R1N.15
NetR1N_16: R1N.16 U1.8 | length 21.5
  Top Layer w0.254: v1(2.6,41.8) 6.2,38.2 6.2,34.624 10.901,29.923 12.127,29.923 U1.8
  Bottom Layer w0.254: v1(2.6,41.8) 7.495,41.8 R1N.16
NetR2N_1: R2N.1 U3.17 | length 6.7
  Bottom Layer w0.254: R2N.1 12.893,30.402 13.16,30.402 13.162,30.4 17.84,30.4 U3.17
NetR2N_2: R2N.2 U3.16 | length 6.2
  Bottom Layer w0.254: R2N.2 12.285,29.74 U3.16
NetR2N_3: R2N.3 U3.15 | length 6.2
  Bottom Layer w0.254: R2N.3 12.285,28.47 U3.15
NetR2N_4: R2N.4 U3.14 | length 6.7
  Bottom Layer w0.254: R2N.4 12.885,26.6 17.85,26.6 U3.14
NetR2N_5: R2N.5 U3.13 | length 6.3
  Bottom Layer w0.254: R2N.5 12.285,25.93 12.843,25.93 12.967,26.054 18.326,26.054 U3.13
NetR2N_6: R2N.6 U3.12 | length 7
  Bottom Layer w0.254: R2N.6 12.893,25.338 13.16,25.338 13.422,25.6 17.043,25.6 17.34,25.303 17.807,25.303 U3.12
NetR2N_7: R2N.7 U3.11 | length 6.2
  Bottom Layer w0.254: R2N.7 12.285,23.39 U3.11
NetR2N_8: R2N.8 U3.10 | length 6.6
  Bottom Layer w0.254: R2N.8 12.695,22.6 17.97,22.6 U3.10
NetR2N_9: R2N.9 U1.29 | length 11.5
  Top Layer w0.254: v1(15.177,17.8) 15.177,19.85 U1.29 U1.29@15.177,19.873
  Bottom Layer w0.254: R2N.9 11.905,17.8 v1(15.177,17.8)
NetR2N_10: R2N.10 U1.26 | length 17.5
  Top Layer w0.254: v1(2.6,23.4) 8.358,23.4 11.908,19.85 U1.26
  Bottom Layer w0.254: v1(2.6,23.4) 7.525,23.4 R2N.10
NetR2N_11: R2N.11 U1.25 | length 15.9
  Top Layer w0.254: v1(2.6,24.7) 7.7,24.7 11,21.4 U1.25 U1.25@12.127,21.423
  Bottom Layer w0.254: v1(2.6,24.7) 7.545,24.7 R2N.11
NetR2N_12: R2N.12 U1.22 | length 15.8
  Top Layer w0.254: v1(2.6,26) 7.119,26 10.219,22.9 U1.22
  Bottom Layer w0.254: v1(2.6,26) 7.515,26 R2N.12
NetR2N_13: R2N.13 U1.21 | length 16.1
  Top Layer w0.254: v1(2.6,27.2) 6.561,27.2 10.361,23.4 U1.21
  Bottom Layer w0.254: v1(2.6,27.2) 7.515,27.2 R2N.13
NetR2N_14: R2N.14 U1.20 | length 16.4
  Top Layer w0.254: v1(2.6,28.5) 5.903,28.5 10.503,23.9 U1.20
  Bottom Layer w0.254: v1(2.6,28.5) 7.545,28.5 R2N.14
NetR2N_15: R2N.15 U1.19 | length 16.7
  Top Layer w0.254: v1(2.6,29.8) 5.245,29.8 10.645,24.4 U1.19
  Bottom Layer w0.254: v1(2.6,29.8) 7.525,29.8 R2N.15
NetR2N_16: R2N.16 U1.18 | length 17
  Top Layer w0.254: v1(2.6,31) 4.687,31 10.787,24.9 U1.18
  Bottom Layer w0.254: v1(2.6,31) 7.505,31 R2N.16
NetR3N_9: R3N.9 U1.42 | length 9.2
  Top Layer w0.254: U1.42 21.7,18.9 25.619,14.981 26.119,14.981 27.345,13.755 R3N.9
NetR3N_10: R3N.10 U1.41 | length 8.6
  Top Layer w0.254: U1.41 21.2,18.392 26.075,13.517 R3N.10
NetR3N_11: R3N.11 U1.40 | length 8
  Top Layer w0.254: U1.40 20.7,17.622 R3N.11@24.805,13.517
NetR3N_12: R3N.12 U1.39 | length 8
  Top Layer w0.254: U1.39 20.2,16.852 23.535,13.517 R3N.12
NetR3N_13: R3N.13 U1.38 | length 7.7
  Top Layer w0.254: U1.38 19.7,16.082 22.265,13.517 R3N.13
NetR3N_14: R3N.14 U1.37 | length 7.3
  Top Layer w0.254: U1.37 19.2,15.312 20.995,13.517 R3N.14
NetR3N_15: R3N.15 U1.36 | length 7
  Top Layer w0.254: U1.36 18.7,14.542 19.725,13.517 R3N.15
NetR3N_16: R3N.16 U1.35 | length 6.7
  Top Layer w0.254: U1.35 18.2,13.505 R3N.16
NetR4N_1: R4N.1 U1.55 | length 8.5
  Top Layer w0.254: U1.55 28.3,23.4 29.955,21.745 R4N.1
NetR4N_2: R4N.2 U1.52 | length 8.4
  Top Layer w0.254: U1.52 29.158,21.9 30.583,20.475 R4N.2
NetR4N_3: R4N.3 U1.51 | length 8.7
  Top Layer w0.254: U1.51 29.016,21.4 31.211,19.205 R4N.3
NetR4N_4: R4N.4 U1.50 | length 10.9
  Top Layer w0.254: U1.50 25.7,18.5 26.265,17.935 R4N.4
NetR4N_5: R4N.5 U1.48 | length 12.5
  Top Layer w0.254: U1.48 24.7,18.468 26.268,16.9 34.815,16.9 R4N.5
NetR4N_6: R4N.6 U1.47 | length 13.6
  Top Layer w0.254: U1.47 24.223,19.827 24.223,18.303 26.126,16.4 31.861,16.4 32.866,15.395 R4N.6
NetR4N_7: R4N.7 U1.46 | length 14.7
  Top Layer w0.254: U1.46 23.7,18.184 25.938,15.946 31.672,15.946 33.493,14.125 R4N.7
NetR4N_8: R4N.8 U1.45 | length 15.8
  Top Layer w0.254: U1.45 23.2,18.042 25.75,15.492 31.484,15.492 34.121,12.855 R4N.8
NetR4N_9: R4N.9
NetR4N_10: R4N.10
NetR4N_11: R4N.11
NetR4N_12: R4N.12
NetR9_1: R9.1 RT1.1 U1.96 | length 8.9
  Top Layer w0.254: RT1.1 R9.1 ; R9.1@10.2,35.8 10.7,36.3 15.358,36.3 15.677,35.981 15.677,34.973 U1.96
NetR9_2: R9.2 U1.2 | length 3.1
  Top Layer w0.254: R9.2 10.302,33.298 10.7,32.9 U1.2
NetR11_2: R11.2 U4.5 | length 2.5
  Bottom Layer w0.254: U4.5 31.053,41.002 R11.2
NetR12_1: R12.1 U3.1 | length 8.4
  Bottom Layer w0.254: R12.1 25.02,32.28 U3.1
NetR12_2: R12.2 U4.1 | length 3.9
  Bottom Layer w0.254: R12.2 25.553,36.398 U4.1
NetR13_1: R13.1 U3.2 | length 12.7
  Bottom Layer w0.254: R13.1 20.74,38.102 19.8,37.162 19.8,35.638 20.115,35.323 21.335,35.323 25.648,31.01 U3.2
NetR13_2: R13.2 U4.4 | length 9.3
  Bottom Layer w0.254: R13.2 23.062,37.838 27.338,37.838 28,38.5 28,40.3 27.295,41.005 U4.4
NetR14_2: R14.2 U1.32 | length 9.1
  Top Layer w0.254: R14.2@16.698,11.216 17.208,11.726 17.208,16.204 16.7,16.712 U1.32
NetR15_2: R15.2 U1.31 | length 11.9
  Top Layer w0.254: R15.2@7.598,18.9 8.398,18.1 12.9,18.1 14,17 15.6,17 16.177,17.577 16.177,19.827 U1.31
NetR17_1: R17.1 U1.78 | length 20.5
  Top Layer w0.254: U1.78 24.677,34.973 24.677,36.115 24.615,36.177 23.823,36.177 23.5,36.5 23.5,48.6 26.7,51.8 R17.1
NetR18_1: R18.1 U1.77 | length 7.6
  Top Layer w0.254: R18.1 26.3,39.872 26.3,37.972 25.2,36.872 U1.77
NetR19_1: R19.1 U1.76 | length 7
  Top Layer w0.254: U1.76 25.7,36.282 26.802,37.384 R19.1
NetR20_1: R20.1 U1.57 | length 3.8
  Top Layer w0.254: U1.57 30.2,24.4 R20.1
NetR21_1: R21.1 U1.56 | length 3.8
  Top Layer w0.254: U1.56 30.1,23.9 R21.1
NetRT1_2: RT1.2 U1.6 | length 5.7
  Top Layer w0.254: RT1.2 10,32.686 10,31.908 10.985,30.923 12.127,30.923 U1.6
NetU1_27: U1.27 U6.9 | length 19.7
  Top Layer w0.254: U6.9 15.255,6.755 15.7,7.2 v1(16.4,7.2) ; U1.27 14.2,21.2 14.5,21.5 v1(14.5,21.7)
  Bottom Layer w0.254: v1(14.5,21.7) 14.5,20.4 15.885,19.015 15.885,13.678 15.698,13.491 15.698,7.702 16,7.4
NetU1_28: U1.28 U6.7 | length 30.5
  Top Layer w0.254: v1(4.6,20.3) 9.1,20.3 10.777,18.623 14.615,18.623 14.677,18.685 14.677,19.85 U1.28 ; U6.7 10.525,8.025 12,9.5 v1(12.1,9.5)
  Bottom Layer w0.254: v1(4.6,20.3) 6.3,20.3 12.1,14.5 v1(12.1,9.5)
RS232_IN: pad.1 U6.10 | length 63.4
  Top Layer w0.254: U6.10 12.425,8.025 10.8,6.4 10.8,1.8 11.6,1 38.3,1 44.5,7.2 44.5,21.8 45.2,22.5 v1(45.6,22.5)
  Bottom Layer w0.254: pad.1 45.4,20.5 45.6,20.7 v1(45.6,22.5)
RS232_OUT: pad.2 U6.8 | length 54.5
  Top Layer w0.254: U6.8 8.973,6.678 8.973,1.527 10,0.5 38.5,0.5 45,7 45,14.1 45.4,14.5 v1(45.65,14.5)
  Bottom Layer w0.254: pad.2 45.65,16.65 v1(45.65,14.5)
VCC_VR1: C1.2 C9.1 C11.1 C12.1 C13.1 C14.1 L1.2 L2.2 P2.A2 P4.2 P5.2 R3.1 U1.14 U1.24 U1.34 U1.44 U1.54 U1.64 U1.74 U1.83 U1.95 U2.A11 U3.18 U5.2 VR1.2 | length 189.6
  Top Layer w0.254: U1.24 12.173,21.923 13.665,21.923 14.642,22.9 15.8,22.9 ; U1.14 14.5,26.9 17.7,23.7 U1.34 ; L2.2 14.58,38.102 L1.2 ; L1.2@14.8,37.5 16.2,36.1 U1.95 16.177,34.927 16.177,34.002 15.8,33.625 v1(15.8,33.4) ; v1@15.8,21.9 15.8,22.9 ; 15.8,25.6 15.8,22.9 ; v1@22,31.2 22.5,31.2 24.2,32.9 U1.74 27.273,32.923 28.415,32.923 28.477,32.985 28.477,38.077 C9.1 31.7,41.3 VR1.2 ; U1.83 22.2,33.6 21.9,33.3 21.9,30.1 22.7,29.3 22.7,27.9 22.7,24.9 ; U1.44 22.7,21.2 v1(23.1,21.6) 22.7,22 22.7,24.9 ; 22.7,27.9 U1.64 33.7,27.9 v1(34.4,27.2) ; U1.54 24.7,22.9 22.7,24.9 ; v1(32.6,4.1) 32.6,3.1 33,2.7 C14.1 ; P5.2 39.38,27.82 C13.1
  Bottom Layer w0.254: P2.A2 6,5.9 C12.1 12.1,6.6 13.308,5.392 17.276,5.392 20.9,9.016 20.9,15.6 16.1,20.4 21.9,20.4 v1(23.1,21.6) 24.7,20 26.3,20 30.623,15.677 30.623,13.402 32.55,11.475 U2.A11 ; v1(15.6,21.7) 15.6,20.858 16.058,20.4 ; v1(15.8,33.4) C11.1 ; U5.2 18.1,40.802 18.785,40.802 19.9,39.687 19.9,37.905 19.017,37.021 18.1,37.021 18.1,36.582 R3.1 17.916,34.416 C11.1 ; v1(21.9,31.2) 20.8,31.2 19.72,32.28 U3.18 15.82,32.28 C11.1 ; v1(34.4,27.2) 37.18,27.2 P5.2 37.92,27.82 38.7,28.6 40.2,28.6 41,27.8 41,24.2 39.9,23.1 C1.2 38.4,22.73 38.73,22.4 38.737,22.4 39.333,21.804 39.333,20.33 39.525,20.138 39.862,20.138 P4.2
VCC_VR2: C16.2 C17.2 P1.P2 R4.1 VR2.2 | length 84.2
  Top Layer w0.254: P1.P2 26.2,2.7 C17.2
  Bottom Layer w0.254: C16.2 5.8,47.918 5.802,47.916 R4.1 ; VR2.2 5.7,48.6 2,48.6 1.1,47.7 1.1,2.4 2.5,1 24.5,1 P1.P2
VCC_VR3: C3.1 C19.2 C20.2 R5.1 U4.3 U6.16 VR3.3 | length 81.3
  Top Layer w0.254: v1(4.6,21.4) 1.6,21.4 1.1,21.9 1.1,44.1 3,46 9,46 v1(12.1,49.1) ; v1(12.1,15.8) U6.16@13.7,15.8 ; C19.2 U6.16@13.7,15.8 ; C20.2 14.005,15.7 U6.16 13.795,15.8 U6.16@13.7,15.8
  Bottom Layer w0.254: v1(4.6,21.4) 6.5,21.4 v1(12.1,15.8) ; R5.1 R5.1@11.702,46.52 ; v1(12.1,49.1) 11.702,48.702 R5.1@11.702,46.52 ; VR3.3 14.5,50.3 C3.1 ; U4.3 25.065,39.735 24.6,40.2 24.6,42.4 22.2,44.8 17.4,44.8 14.5,47.7 C3.1 ; R5.1@11.702,46.52 13.982,48.8 C3.1
pads on no net: P1.P3 P1.P12 P1.P13 P1.P14 P1.P15 P1.P16 P1.P17 P1.P18 P1.P19 P1.P20 P4.3 P4.4 P5.3 P7.5 P7.6 U1.1 U1.5 U1.7 U1.30 U1.49 U1.58 U1.59 U1.60 U1.61 U1.62 U1.65 U1.66 U1.67 U1.68 U1.69 U1.70 U1.71 U1.72 U1.75 U1.79 U1.80 U1.81 U1.82 U1.85 U1.86 U1.87 U1.88 U1.97 U1.98 U1.99 U1.100 U2.A2 U2.A3 U2.A4 U2.A5 U2.A6 U2.A7 U2.A8 U2.A9 U2.A10 U2.A13 U2.A15 U2.A16 U2.A17 U2.A18 U2.A20 U2.A21 U2.A22 U2.A23 U2.A24 U2.A25 U2.A26 U2.A27 U2.A28 U2.A29 U2.A30 U2.A31 U2.A32 U2.SH1 U2.SH2 U2.SH3 U2.SH4 U6.11 U6.12 U6.13 U6.14

## Polygon pours and split planes (outlines as drawn)
GND on GND (split plane): 48.29,0.51 0.51,0.51 0.51,61.69 48.29,61.69

## Silkscreen, mask and mechanical layers (free items; w line width, h text height)
Bottom Overlay:
  text "OUT" at 48.4,21.9 h1 r90
  text "RS232" at 44.8,21 h1 r90
  text "IN" at 48.4,17.7 h1 r90
Mechanical 1:
  the board outline again, w0.254

## Text inside footprints (layer, text, board x,y; h text height)
P7: Bottom Overlay "Chassis" at 33.2,61.75 h1.52 r90